# EAGLE board BP.LCDadapter.v2b (EAGLE 5.06)
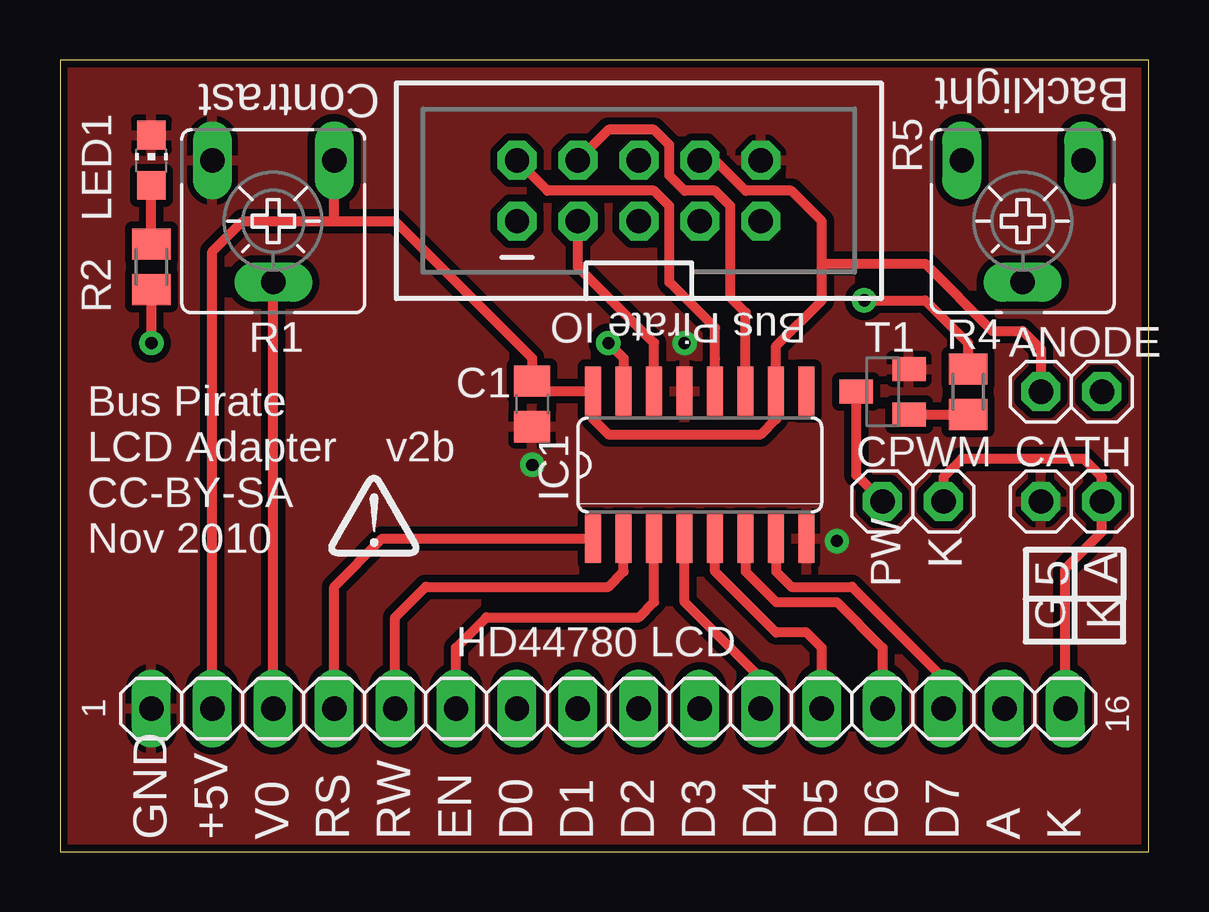
[diagram p0: board, top side]
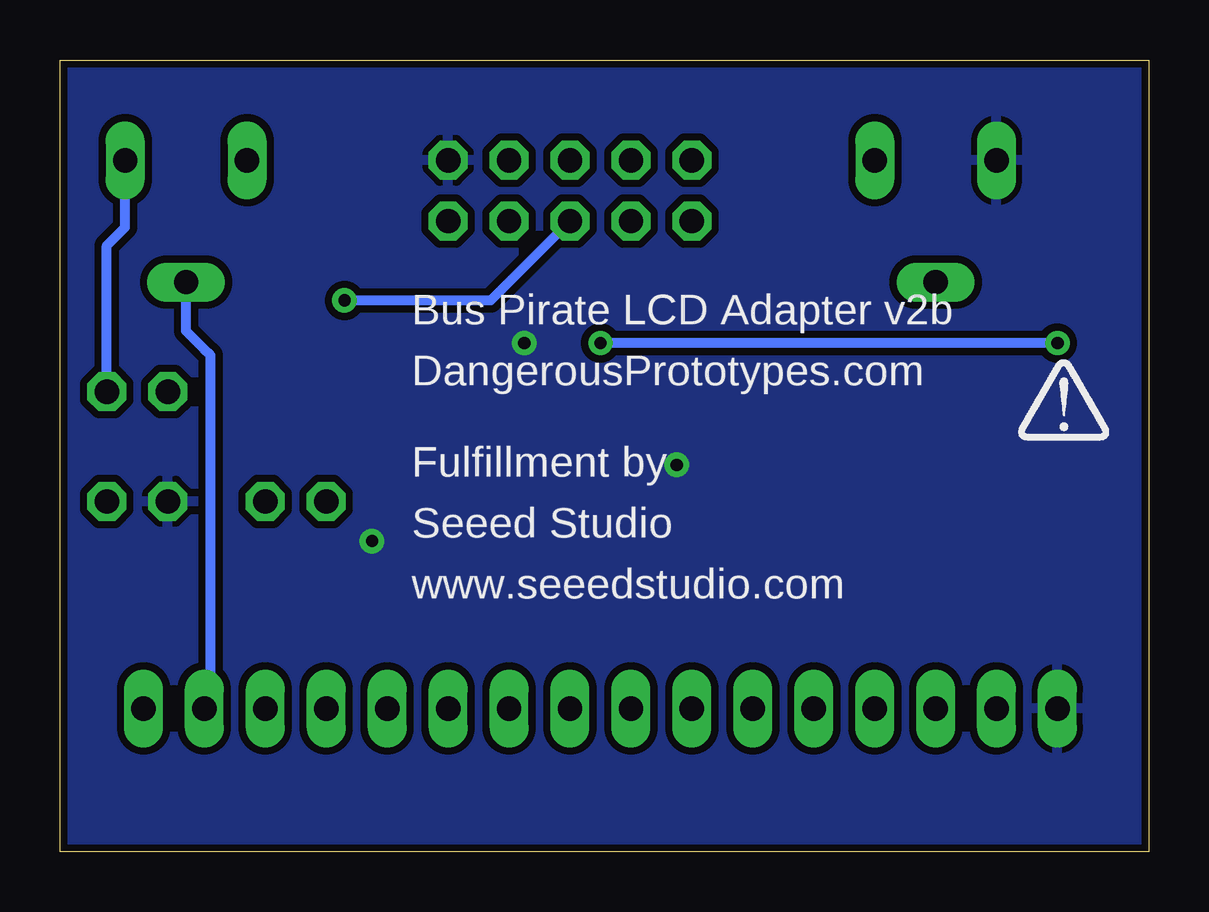
[diagram p1: board, bottom side, seen from below]

Size 45.39 x 33.01 mm. Coordinates in mm from the lower left corner, seen from the top.
Outline: 0,0 45.39,0 45.39,33.01 0,33.01 0,0
Copper layers (1*16): Top 0.035mm / dielectric 1.5mm / Bottom 0.035mm
Design rules "SparkFun": minimum track width 8mil, minimum drill 20mil, track to track 8mil, track to pad 8mil, pad to pad 8mil, via to via 8mil, smd to smd 8mil, copper to edge 10mil, drill to drill 8mil, minimum pad ring 12mil, minimum via ring 10mil, stop-mask expansion 4mil, vias tented up to drill 25mil, thermal gap 10mil

## Footprints (pad centres in the part's own frame; a part is rotated, then mirrored left to right if it is on the bottom)
1X02 = drill 1.016 octagon: 1 -1.27,0; 2 1.27,0
C0805 = smd 1.3 x 1.5: 1 -0.95,0; 2 0.95,0
SO16 = smd 0.66 x 2.032: 1 -4.445,-3.073; 2 -3.175,-3.073; 3 -1.905,-3.073; 4 -0.635,-3.073; 5 0.635,-3.073; 6 1.905,-3.073; 7 3.175,-3.073; 8 4.445,-3.073; 9 4.445,3.073; 10 3.175,3.073; 11 1.905,3.073; 12 0.635,3.073; 13 -0.635,3.073; 14 -1.905,3.073; 15 -3.175,3.073; 16 -4.445,3.073
2X5-SHROUDED = drill 1.016 octagon: 1 -1.27,5.08; 2 1.27,5.08; 3 -1.27,2.54; 4 1.27,2.54; 5 -1.27,0; 6 1.27,0; 7 -1.27,-2.54; 8 1.27,-2.54; 9 -1.27,-5.08; 10 1.27,-5.08
1X16 = drill 1.016 long: 1 -19.05,0; 2 -16.51,0; 3 -13.97,0; 4 -11.43,0; 5 -8.89,0; 6 -6.35,0; 7 -3.81,0; 8 -1.27,0; 9 1.27,0; 10 3.81,0; 11 6.35,0; 12 8.89,0; 13 11.43,0; 14 13.97,0; 15 16.51,0; 16 19.05,0
CHIP-LED0805 = smd 1.2 x 1.2: A 0,-1.05; C 0,1.05
CA6V = drill 1.016 long: A -2.54,-2.54; E 2.54,-2.54; S 0,2.54
M0805 = smd 1.3 x 1.6: 1 -0.95,0; 2 0.95,0
SOT23-BEC = smd 1 x 1.4: B -0.95,-1.1; C 0,1.1; E 0.95,-1.1

## Placement (x,y rotation side)
ANODE  [1X02]  42.16,19.18 0 top
C1  0.1uF  [C0805]  19.69,18.67 270 top
CATH  [1X02]  42.16,14.61 0 top
CPWM  [1X02]  35.56,14.61 180 top
IC1  74HCT595D  [SO16]  26.67,16.13 0 top
JP1  M05X2SHD  [2X5-SHROUDED]  24.13,27.56 90 top
LCD  [1X16]  22.86,5.97 0 top
LED1  [CHIP-LED0805]  3.81,28.83 0 top
R1  10K  [CA6V]  8.89,26.29 180 top
R2  1K  [M0805]  3.81,24.38 270 top
R4  1K  [M0805]  37.85,19.18 90 top
R5  100R  [CA6V]  40.13,26.29 180 top
T1  [SOT23-BEC]  34.29,19.18 90 top
U$1  [DP_LOGO]  13.08,12.95 0 top
U$2  [DP_LOGO]  3.56,17.78 0 bottom

## Library data of the parts
ANODE CATH CPWM = pinhead - Copy
C1 R2 R4 = rcl
IC1 = 74xx-eu
JP1 = SparkFun
LCD = pinhead
LED1 = led
R1 R5 = pot
T1 U$1 U$2 = dp_devices

## Nets
3V3: JP1.9
ADC: JP1.7
AUX: JP1.5 R4.2
CLK: IC1.11 JP1.4
CS: IC1.12 JP1.2
D0: LCD.7
D01: LCD.8
D02: LCD.9
D03: LCD.10
D04: IC1.4 LCD.11
D05: IC1.5 LCD.12
D06: IC1.6 LCD.13
D07: IC1.7 LCD.14
EN: IC1.3 LCD.6
GND: C1.2 CATH.1 IC1.8 IC1.13 JP1.10 LCD.1 LED1.C R1.E T1.E
K: CATH.2 CPWM.1 LCD.16
MISO: JP1.1
MOSI: IC1.14 JP1.3
N$1: IC1.15 R2.2
N$2: LED1.A R2.1
N$3: ANODE.2 R5.A
N$4: LCD.15 R5.S
N$6: CPWM.2 T1.C
N$7: LCD.3 R1.S
N$8: R4.1 T1.B
RS: IC1.1 LCD.4
RW: IC1.2 LCD.5
VCC: ANODE.1 C1.1 IC1.10 IC1.16 JP1.8 LCD.2 R1.A
VTARGET: JP1.6

## Tracks (layer width: path | path; a pad name or v marks a point on that pad's centre or on a via)
AUX  (via drill 0.51)
  Top 0.406: v33.53,22.99 36.07,22.99 37.85,21.21 R4.2
  Bottom 0.406: v33.53,22.99 27.43,22.99 JP1.5
CLK
  Top 0.406: JP1.4 22.86,30.1 24.77,30.1 25.4,29.46 25.4,28.19 26.03,27.56 27.3,27.56 27.94,26.92 27.94,23.11 28.57,22.48 IC1.11
CS
  Top 0.406: 27.3,20.57 IC1.12 27.3,21.84 25.4,23.75 25.4,26.92 24.77,27.56 20.32,27.56 JP1.2
D04
  Top 0.406: IC1.4 26.03,10.41 29.2,7.24 29.21,7.24 LCD.11
D05
  Top 0.406: 31.74,7.24 31.74,6.6 31.75,6.61 | IC1.5 27.3,11.68 29.84,9.14 31.12,9.14 31.75,8.51 31.75,6.61 | 31.75,6.61 LCD.12
D06
  Top 0.406: IC1.6 28.57,11.68 29.84,10.41 32.38,10.41 34.29,8.51 LCD.13
D07
  Top 0.406: IC1.7 29.84,11.68 30.48,11.05 33.02,11.05 36.83,7.24 LCD.14
EN
  Top 0.406: IC1.3 24.77,10.41 24.13,9.78 17.78,9.78 16.51,8.51 LCD.6
GND  (via drill 0.51)
  other vias: 26.03,21.21 32.38,12.95 19.69,16.13
  pour Bottom (isolate 0.305): 0,33.02 45.72,33.02 45.72,0 0,0
  pour Top (isolate 0.305): 0,33.02 45.72,33.02 45.72,0 0,0
K
  Top 0.406: LCD.16 41.91,11.81 43.43,13.34 CATH.2 43.43,15.62 42.67,16.38 37.59,16.38 36.83,15.62 CPWM.1
MOSI
  Top 0.406: JP1.3 21.59,24.38 24.77,21.21 IC1.14
N$1  (via drill 0.51)
  Top 0.406: R2.2 v3.81,21.21 | v22.86,21.21 23.49,20.57 IC1.15
  Bottom 0.406: v3.81,21.21 v22.86,21.21
N$2
  Top 0.406: R2.1 LED1.A
N$3
  Bottom 0.406: ANODE.2 43.43,25.27 42.67,26.04 R5.A
N$4
  Bottom 0.406: LCD.15 39.12,5.97 39.12,20.7 39.37,20.96 40.13,21.72 R5.S
N$6
  Top 0.406: T1.C 33.19,15.71 CPWM.2
N$7
  Top 0.406: R1.S 9.53,23.75 8.89,23.11 LCD.3
N$8
  Top 0.406: T1.B R4.1
RS
  Top 0.406: IC1.1 13.44,13.06 11.43,11.05 LCD.4
RW
  Top 0.406: IC1.2 23.49,11.68 22.86,11.05 15.24,11.05 13.97,9.78 LCD.5
VCC
  Top 0.406: C1.1 20.1,19.2 IC1.16 22.23,18.03 22.86,17.4 29.21,17.4 29.84,18.03 IC1.10 29.84,21.08 31.75,22.99 31.75,24.51 | 11.43,26.29 R1.A | JP1.8 27.3,28.83 28.57,27.56 30.48,27.56 31.75,26.29 31.75,24.51 | 11.43,26.29 7.62,26.29 6.35,25.02 LCD.2 | C1.1 19.37,19.94 | C1.1 19.69,20.57 13.97,26.29 11.43,26.29 | ANODE.1 40.89,20.96 40.13,21.72 38.86,21.72 36.07,24.51 31.75,24.51

## Text on the board
tNames: Contrast | Backlight | Bus Pirate IO | Bus Pirate | LCD Adapter | v2b | CC-BY-SA | Nov 2010 | K | PW | 5 | A | G | K | HD44780 LCD | 1 | 16 | GND | +5V | V0 | RS | RW | EN | D0 | D1 | D2 | D3 | D4 | D5 | D6 | D7 | A | K
bNames: Bus Pirate LCD Adapter v2b | DangerousPrototypes.com | Fulfillment by | Seeed Studio | www.seeedstudio.com